# Altium PCB demo_dermis_main_testboard_scratch.PcbDoc (part 5 of 7)
Units mm, origin at the board's own origin, x right, y up, seen from the top; angles counter-clockwise.
Board outline 348.67 x 247.5 mm, 4 copper layers (Top Layer, Layer 1, Layer 2, Bottom Layer), stack 0.603 mm thick; 416 components, 288 nets, 1934 pads, 1690 vias.
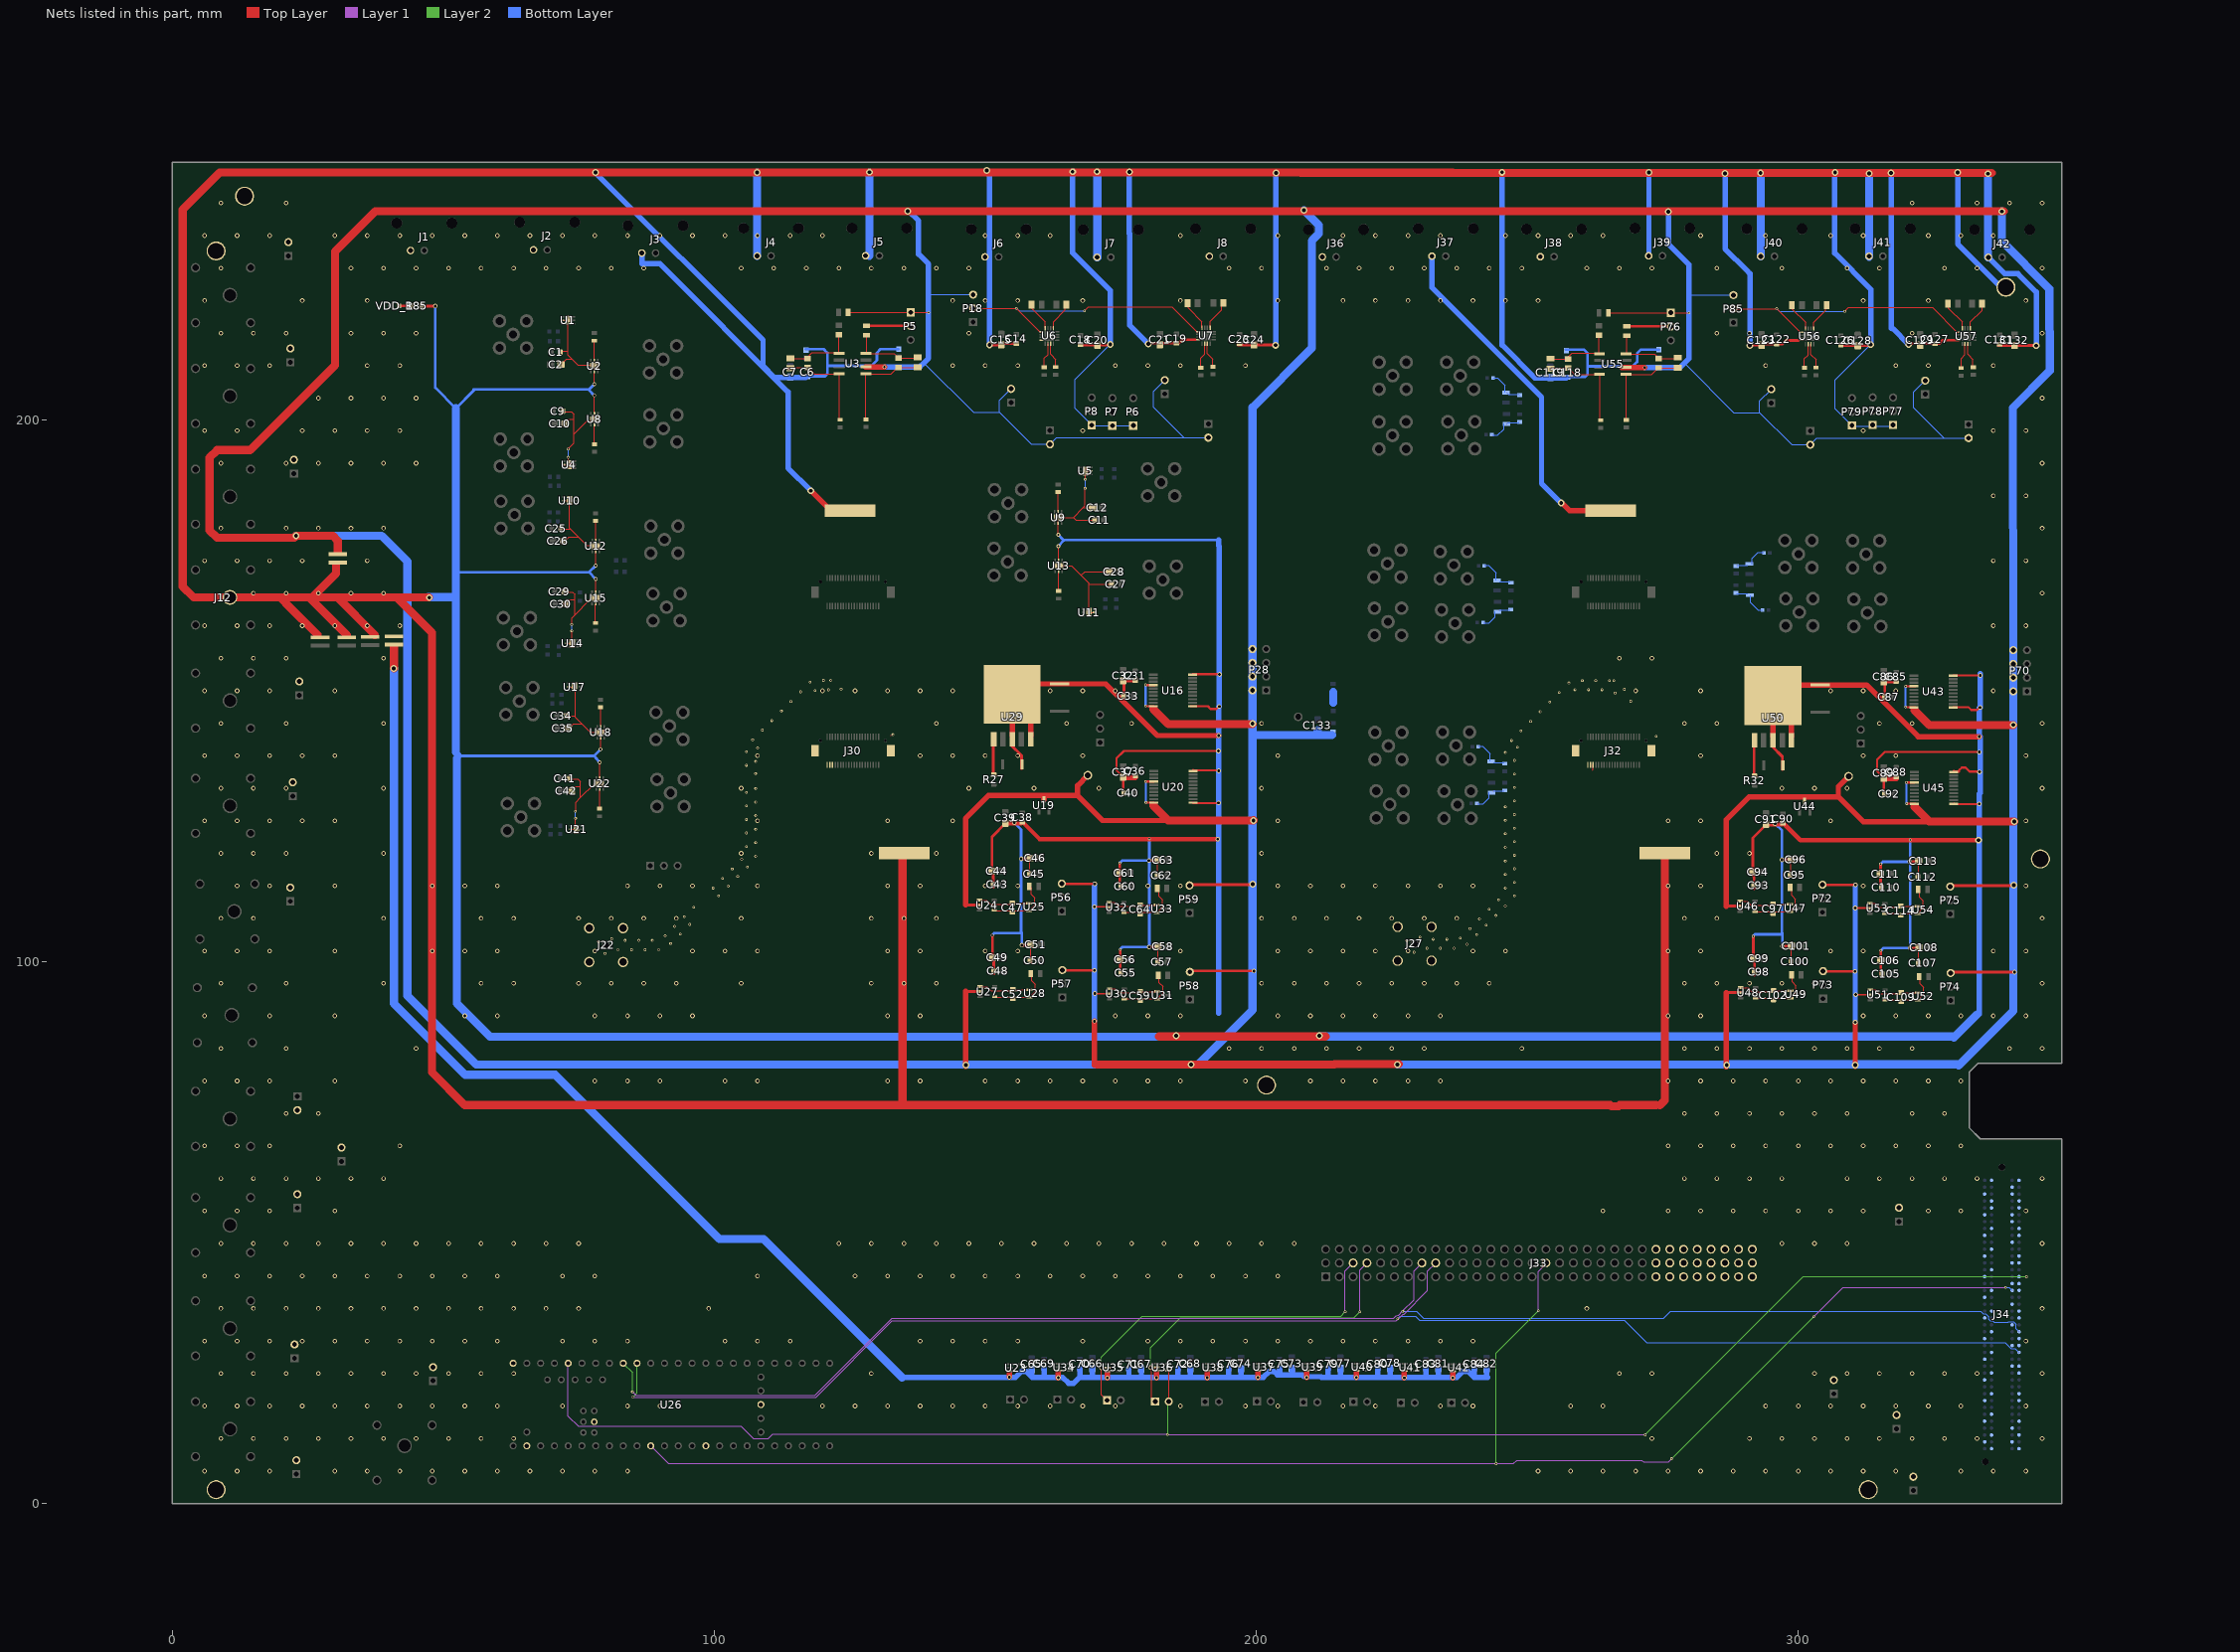
[diagram p6: the nets of this part, all layers, seen from the top]

## Via types
v1: diameter 0.85, hole 0.5, Top Layer to Bottom Layer, 1036 vias
v2: diameter 0.5, hole 0.3, Top Layer to Bottom Layer, 455 vias
v3: diameter 1.27, hole 0.711, Top Layer to Bottom Layer, 133 vias
v4: diameter 0.7, hole 0.4, Top Layer to Bottom Layer, 26 vias
v5: diameter 0.4, hole 0.25, Top Layer to Bottom Layer, 24 vias
v6: diameter 1.1, hole 0.7, Top Layer to Bottom Layer, 16 vias

## Nets (pads, with @x,y where several pads share a name; then routed paths per layer and width w, separated by ;. In a path a pad name is that pad's centre, name@x,y a point inside that pad or via, vN(x,y) a via of type N, cw(c..) or ccw(c..) an arc to the next point about the centre after c; other vN are vias at no path point) (continued)
GND: C1.2 C2.2 C3.2 C6.2 C7.2 C8.2 C9.2 C10.2 C11.2 C12.2 C14.2 C15.2 C18.2 C19.2 C20.2 C21.2 C23.2 C24.2 C25.2 C26.2 C27.2 C28.2 C29.2 C30.2 C31.2 C32.2 C33.2 C34.2 C35.2 C36.2 C37.2 C38.2 C39.2 C40.2 C41.2 C42.2 C43.2 C44.2 C45.2 C46.2 C48.2 C49.2 C50.2 C51.2 C53.2 C54.2 C55.2 C56.2 C57.2 C58.2 C60.2 C61.2 C62.2 C63.2 C85.2 C86.2 C87.2 C88.2 C89.2 C90.2 C91.2 C92.2 C93.2 C94.2 C95.2 C96.2 C98.2 C99.2 C100.2 C101.2 C103.2 C104.2 C105.2 C106.2 C107.2 C108.2 C110.2 C111.2 C112.2 C113.2 C115.2 C118.2 C119.2 C120.2 C122.2 C123.2 C126.2 C127.2 C128.2 C129.2 C131.2 C132.2 J1.1 J2.1 J3.1 J4.1 J5.1 J6.1 J7.1 J8.1 J12.1 J17.1 J19.1 J21.1 J22.2 J22.3 J22.4 J22.5 J24.1 J27.2 J27.3 J27.4 J27.5 J30.36 J30.38 J30.40 J30.S1 J30.S2 J32.36 J32.38 J32.40 J32.S1 J32.S2 J33.73 J33.74 J33.75 J33.76 J33.77 J33.78 J33.79 J33.80 J33.81 J33.82 J33.83 J33.84 J33.85 J33.86 J33.87 J33.88 J33.89 J33.90 J33.91 J33.92 J33.93 J33.94 J33.95 J33.96 J34.C01 J34.C04 J34.C05 J34.C08 J34.C09 J34.C12 J34.C13 J34.C16 J34.C17 J34.C20 J34.C21 J34.C24 J34.C25 J34.C28 J34.C29 J34.C32 J34.C33 J34.C36 J34.C38 J34.C40 J34.D02 J34.D03 J34.D06 J34.D07 J34.D10 J34.D13 J34.D16 J34.D19 J34.D22 J34.D25 J34.D28 J34.D37 J34.D39 J34.G01 J34.G04 J34.G05 J34.G08 J34.G11 J34.G14 J34.G17 J34.G20 J34.G23 J34.G26 J34.G29 J34.G32 J34.G35 J34.G38 J34.G40 J34.H03 J34.H06 J34.H09 J34.H12 J34.H15 J34.H18 J34.H21 J34.H24 J34.H27 J34.H30 J34.H33 J34.H36 J34.H39 J36.1 J37.1 J38.1 J39.1 J40.1 J41.1 J42.1 P3.2 P6.1 P7.1 P8.1 P11.2 P13.2 P23.2 P24.2 P26.2 P29.2 P34.2 P37.2 P42.2 P45.2 P48.2 P77.1 P78.1 P79.1 P80.2 P81.2 P82.2 P88.2 pad.3 R15.1 R16.1 R17.1 R18.1 R20.1 R85.2 U1.5 U1.7 U2.5 U2.7 U4.5 U4.7 U5.5 U5.7 U6.16 U7.16 U8.5 U8.7 U9.5 U9.7 U10.5 U10.7 U11.5 U11.7 U12.5 U12.7 U13.5 U13.7 U14.5 U14.7 U15.5 U15.7 U16.11 U16.20 U17.5 U17.7 U18.5 U18.7 U20.11 U20.20 U21.5 U21.7 U22.5 U22.7 U26.GND1 U26.GND2 U26.GND3 U26.GND4 U26.GND5 U29.3 U29.5 U29.6 U43.11 U43.20 U45.11 U45.20 U50.3 U50.5 U50.6 U56.16 U57.16 | length 3091.6
  Top Layer w0.15: U10.5@72.283,185.099 73.309,185.099 U10.7@73.312,185.099 ; 132.532,141.741 132.564,141.708 ; C46.2@157.999,118.994 158.253,118.994 C46.2@158.263,119.087 ; C51.2@158.1,103.043 158.354,103.043 C51.2@158.364,103.135 ; 166.266,181.98 166.792,181.454 C11.2@170.184,181.454 ; 167.719,171.268 168.438,171.987 C28.2@172.892,171.987 ; 168.035,183.749 C12.2@169.754,183.749 ; U5.7@168.477,190.55 U5.5@169.506,190.55 ; 169.158,169.703 169.17,169.692 C27.2@173.322,169.692 ; C63.2@181.565,118.659 181.819,118.659 C63.2@181.828,118.752 ; C58.2@181.63,102.709 181.884,102.709 C58.2@181.894,102.802 ; 262.09,135.361 262.169,135.44 J32.36@262.169,136.33 ; C96.2@298.36,118.793 298.614,118.793 C96.2@298.623,118.886 ; C101.2@298.461,102.842 298.715,102.842 C101.2@298.724,102.935 ; C113.2@321.925,118.458 322.179,118.458 C113.2@322.188,118.55 ; C108.2@321.991,102.508 322.245,102.508 C108.2@322.254,102.601 ; 328.858,214.704 328.861,214.701
  Top Layer w0.2: C1.2@71.358,212.66 73.023,212.66 ; C2.2@71.779,210.373 71.855,210.373 72.705,211.223 73.797,211.223 ; C25.2@71.82,179.808 73.48,179.808 ; C9.2@71.947,201.474 71.957,201.486 73.69,201.486 74.103,201.072 74.103,200.074 ; U1.5@72.034,218.377 U1.7@73.062,218.377 73.062,211.957 73.797,211.223 ; C10.2@72.111,199.224 72.186,199.224 73.036,200.074 74.103,200.074 ; C29.2@72.157,168.208 73.89,168.208 74.303,167.795 74.303,166.797 ; U4.5@72.22,191.718 U4.7@73.249,191.718 73.082,191.885 v2(73.082,193.079) ; C26.2@72.316,177.521 73.166,178.371 74.824,178.371 ; C30.2@72.385,165.946 73.236,166.797 74.303,166.797 ; C34.2@72.667,145.331 74.327,145.331 ; U14.5@72.791,158.73 U14.7@73.82,158.73 ; v2(73.06,194.625) 74.103,195.667 74.103,197.315 ; C35.2@73.088,143.044 73.163,143.044 74.013,143.894 75.544,143.894 ; C41.2@73.171,133.707 74.903,133.707 75.316,133.295 75.316,132.296 ; U17.5@73.21,150.72 U17.7@74.239,150.72 ; U10.7@73.309,185.099 73.309,179.98 73.48,179.808 ; C42.2@73.399,131.446 74.25,132.296 75.316,132.296 ; U21.5@73.536,124.443 U21.7@74.565,124.443 ; U14.7@73.731,159.505 v2(73.731,161.057) ; v2@73.754,162.291 73.754,163.438 77.64,167.324 U15.7@78.149,167.324 ; 74.303,164.037 74.303,166.797 ; U17.7@74.407,150.552 74.374,150.518 74.374,147.68 74.407,147.646 74.407,145.073 77.135,142.344 U18.7@78.516,142.344 ; U21.7@74.427,125.001 v2(74.427,126.473) ; v2@74.45,127.786 74.45,129.428 75.335,130.313 ; U12.7@77.49,176.778 76.51,176.778 73.48,179.808 ; U8.5@77.891,200.878 v4(77.891,204.498) ; v4(77.891,206.59) U2.5@77.891,208.934 77.891,209.4 77.61,209.682 77.172,210.12 74.9,210.12 73.797,211.223 ; U8.5@77.922,201.152 U8.7@77.922,200.124 77.501,199.703 76.491,199.703 74.103,197.315 ; U15.7@78.151,167.136 v4(78.151,170.65) ; v4(78.157,173.096) U12.7@78.157,176.706 ; U22.7@78.878,132.849 78.845,132.819 77.841,132.819 75.335,130.313 ; U22.7@78.893,133.239 v4(78.893,136.753) ; v4(79.052,139.199) U18.7@79.052,142.259 ; U29.6@157.664,147.017 U29.6@158.412,147.017 ; C46.2@157.999,118.994 158.265,118.728 C45.2@158.265,116.454 ; C51.2@158.1,103.043 158.366,102.777 C50.2@158.366,100.503 ; U9.5@163.469,180.966 U9.7@163.469,181.995 163.482,181.98 166.266,181.98 168.035,183.749 168.445,184.16 v2@168.445,187.551 ; v4@163.476,178.797 U9.5@163.476,180.958 ; v4@163.523,176.658 163.523,173.084 U13.7@163.57,173.037 ; U13.7@164.379,173.044 165.943,173.044 167.719,171.268 169.158,169.829 169.158,169.703 U11.7@169.158,164.474 ; C18.2@167.586,213.898 C18.2@167.721,213.762 ; v2(168.469,189.019) U5.7@168.469,190.57 ; U11.7@169.123,164.474 U11.7@169.158,164.474 ; U11.5@170.151,164.474 U11.7@169.158,164.474 ; C37.2@175.453,134.057 C37.2@175.453,134.132 ; C63.2@181.565,118.659 181.831,118.393 C62.2@181.831,116.119 ; C58.2@181.63,102.709 181.896,102.443 C57.2@181.896,100.169 ; U50.6@298.024,146.816 U50.6@298.773,146.816 ; C96.2@298.36,118.793 298.626,118.527 C95.2@298.626,116.253 ; C101.2@298.461,102.842 298.727,102.576 C100.2@298.727,100.302 ; C89.2@315.813,133.856 C89.2@315.813,133.931 ; C113.2@321.925,118.458 322.191,118.192 C112.2@322.191,115.918 ; C108.2@321.991,102.508 322.257,102.242 C107.2@322.257,99.968 ; 74.103,197.315 74.103,200.074 ; 75.316,132.296 75.316,130.33 75.335,130.313
  Top Layer w0.4: C37.2@175.453,134.132 174.209,135.376 174.209,137.507 175.594,138.892 v1(193.044,138.892) ; U16.11@187.94,147.136 U16.11@188.253,147.136 191.092,147.136 191.579,146.649 192.625,146.649 193.107,147.131 v1@193.2,147.131 ; U16.20@188.253,152.986 188.253,153.015 188.298,153.061 v1@193.241,153.061 ; U20.11@188.359,129.351 188.359,129.272 v1@192.991,129.272 ; U20.20@188.359,135.375 188.446,135.288 193.129,135.288 v1@193.139,135.279 ; C89.2@315.813,133.931 314.57,135.175 314.57,137.305 315.955,138.691 v1(333.405,138.691) ; U43.11@328.614,146.935 331.452,146.935 331.939,146.448 332.986,146.448 v1@333.468,146.93 ; U43.20@328.614,152.785 328.614,152.814 328.659,152.86 v1@333.602,152.86 ; U45.11@328.719,129.15 328.719,129.071 v1@333.352,129.071 ; U45.20@328.719,135.174 328.806,135.087 329.705,135.087 329.705,135.348 330.188,135.831 330.872,135.831 331.616,135.087 v1@333.489,135.087 ; 328.861,214.701 U57.16@329.577,214.701
  Top Layer w0.5: R85.2@46.195,220.992 v1(48.535,220.992) ; v3(150.801,213.819) 150.822,213.841 152.973,213.841 C15.2@152.994,213.861 153.206,214.073 C14.2@155.754,214.073 ; C44.2@151.254,116.724 151.254,123.035 153.718,125.499 C39.2@153.718,125.573 ; C44.2@151.268,116.581 151.268,116.112 151.495,115.885 151.495,113.699 ; C49.2@151.355,100.773 v2@151.355,104.837 ; C49.2@151.369,100.63 151.369,100.161 151.596,99.934 151.596,97.748 ; U29.3@154.829,141.851 154.829,139.933 156.731,138.031 C53.2@156.731,135.635 ; v1(156.643,118.994) C46.2@157.999,118.994 ; v1(156.744,103.043) C51.2@158.1,103.043 ; v4@163.476,178.797 v4(163.485,178.789) ; v4(163.485,176.697) v4@163.523,176.658 ; C18.2@167.721,213.762 C20.2@170.712,213.762 v3@172.969,213.762 ; C60.2@174.834,113.795 v2(174.834,118.222) ; C55.2@174.899,97.846 v2(174.899,102.272) ; C40.2@175.453,130.869 C37.2@175.453,133.755 ; C33.2@175.533,149.052 175.603,149.052 C32.2@175.603,151.556 ; C32.2@175.603,151.775 C31.2@177.866,151.775 ; v3(180.107,214.002) 180.237,214.133 185.703,214.133 186.354,214.783 188.746,214.783 ; v1(180.208,118.659) C63.2@181.565,118.659 ; v1(180.274,102.709) C58.2@181.63,102.709 ; C23.2@196.617,213.822 v3@203.653,213.822 ; v3@291.095,213.762 293.245,213.762 C123.2@293.267,213.783 ; C94.2@291.615,116.523 291.615,122.834 294.078,125.297 C91.2@294.078,125.373 ; C94.2@291.629,116.38 291.629,115.911 291.856,115.684 291.856,113.498 ; C99.2@291.715,100.572 v2@291.715,104.636 ; C99.2@291.73,100.429 291.73,99.96 291.957,99.733 291.957,97.547 ; C123.2@293.479,213.994 C122.2@296.026,213.994 297.08,213.994 297.731,214.645 300.044,214.645 ; U50.3@295.189,141.65 295.189,139.732 297.092,137.83 C103.2@297.092,135.434 ; v1(297.003,118.793) C96.2@298.36,118.793 ; v1(297.104,102.842) C101.2@298.461,102.842 ; C126.2@307.993,213.683 C128.2@310.984,213.683 v3@313.241,213.683 ; C110.2@315.194,113.594 v2(315.194,118.021) ; C105.2@315.26,97.645 v2(315.26,102.071) ; C92.2@315.813,130.669 C89.2@315.813,133.555 ; C87.2@315.894,148.852 315.963,148.852 C86.2@315.963,151.355 ; C86.2@315.963,151.574 C85.2@318.227,151.574 ; v3@320.509,214.054 325.976,214.054 326.626,214.704 328.858,214.704 ; v1(320.569,118.458) C113.2@321.925,118.458 ; v1(320.634,102.508) C108.2@321.991,102.508 ; C131.2@336.889,213.743 v3@343.925,213.743
  Top Layer w0.8: C39.2@153.718,125.573 C38.2@156.652,125.573 ; C38.2@156.841,125.763 156.891,125.763 160.019,122.634 182.945,122.634 182.917,122.631 v1(192.882,122.631) ; C91.2@294.078,125.373 C90.2@297.012,125.373 ; C90.2@297.201,125.561 297.251,125.561 300.38,122.433 323.306,122.433 323.278,122.43 v3(333.243,122.43)
  Top Layer w1: v3(117.844,186.91) 121.502,183.253 J17.1@125.062,183.253 ; U29.3@154.985,141.728 U29.6@154.985,149.335 ; U29.6@156.392,147.927 U29.6@154.985,149.335 ; U29.5@158.412,141.711 U29.6@158.412,147.017 ; 172.08,151.275 156.919,151.275 U29.6@154.982,149.338 U29.6@154.985,149.335 ; 172.255,151.275 175.005,148.525 181.793,141.737 v1(193.064,141.737) ; C37.2@175.453,133.974 C36.2@177.716,133.974 ; v3(256.268,184.654) 256.428,184.654 257.83,183.253 J21.1@265.386,183.253 ; U50.3@295.346,141.527 295.346,149.134 U50.6@295.343,149.137 297.28,151.074 312.441,151.074 ; U50.5@298.773,141.511 U50.6@298.773,146.816 ; 312.616,151.074 322.153,141.536 v1(333.424,141.536) ; C89.2@315.813,133.774 C88.2@318.077,133.774
  Top Layer w1.5: 26.805,160.339 26.197,160.947 21.822,165.322 19.924,167.22 ; 30.265,173.167 30.265,171.63 25.855,167.22 ; 32.222,160.287 25.289,167.22 ; 37.411,160.306 30.497,167.22 ; v3@47.404,167.22 41.422,167.22 ; J19.1@134.735,119.782 134.735,73.534 ; 182.085,86.184 212.804,86.184 ; v3@203.69,245.621 208.251,245.616 211.751,245.613 215.251,245.609 218.751,245.605 222.251,245.602 225.751,245.598 229.251,245.595 232.751,245.591 236.251,245.587 v3@245.169,245.578 ; v3@203.69,245.641 8.803,245.641 1.933,238.771 1.933,169.255 3.968,167.22 J12.1@10.67,167.22 19.924,167.22 ; v3@245.359,245.578 249.411,245.574 261.196,245.562 335.688,245.562 ; 273.759,73.534 273.756,73.532 267.045,73.532 266.845,73.332 265.531,73.332 265.331,73.532 134.737,73.532 134.735,73.534 ; 274.507,73.534 275.386,74.413 J24.1@275.386,120.052 ; 19.924,167.22 25.289,167.22 ; 25.289,167.22 25.855,167.22 ; 25.855,167.22 30.497,167.22 ; 30.497,167.22 41.422,167.22 ; 41.422,167.22 47.941,160.701 47.941,79.602 54.009,73.534 134.735,73.534
  Bottom Layer w0.15: v3@47.286,167.274 47.44,167.12 v3(47.44,167.184)
  Bottom Layer w0.2: v2(73.06,194.625) 73.082,194.603 v2(73.082,193.079) ; v2@73.719,161.067 v2@73.719,162.234 ; v2@74.415,126.563 v2@74.415,127.729 ; v2@168.48,187.551 v2@168.48,189.008 ; P8.1@169.139,198.922 P7.1@173.467,198.922 P6.1@177.796,198.922 ; P8.1@169.657,199.017 166.579,202.095 166.579,207.441 v3(173.081,213.943) ; P79.1@309.412,198.843 P77.1@318.068,198.843 ; P79.1@309.929,198.938 306.852,202.016 306.852,207.362 v3(313.354,213.863)
  Bottom Layer w0.5: v1(48.535,220.992) 48.55,205.897 52.326,202.122 55.63,205.426 55.63,205.612 76.912,205.612 v4(77.891,206.59) ; 52.43,171.87 76.931,171.87 v4(78.151,170.65) ; 52.953,137.973 77.826,137.973 v4(78.893,136.753) ; 76.912,205.477 v4(77.891,204.498) ; 76.96,171.899 v4(78.157,173.096) ; 77.855,138.002 v4(79.052,139.199) ; C3.2@116.864,213.049 120.199,213.049 120.877,212.371 120.877,209.974 ; C6.2@117.207,207.934 117.137,208.037 120.442,208.037 120.877,208.471 120.877,209.974 ; C8.2@134.037,213.047 130.702,213.047 130.024,212.369 130.024,210.977 129.789,210.742 129.02,209.974 120.877,209.974 ; v2(151.292,104.871) 151.677,105.256 156.744,105.256 v1(156.744,103.043) ; v1(155.383,125.659) 156.643,124.399 v1(156.643,118.994) 156.643,105.483 156.72,105.406 ; v4(163.485,176.697) 164.531,177.743 164.463,177.81 v4(163.485,178.789) ; 164.698,177.81 193.05,177.81 ; v2(174.834,118.222) 175.271,118.659 v1(180.208,118.659) ; v2(174.899,102.272) 175.337,102.709 v1(180.274,102.709) ; v1@180.278,102.709 180.278,112 180.278,118.481 180.278,118.659 v2(180.278,122.672) ; C115.2@257.136,212.97 260.471,212.97 261.149,212.292 261.149,209.895 ; C118.2@257.48,207.855 257.409,207.958 260.715,207.958 261.149,208.392 261.149,209.895 ; C120.2@274.309,212.968 270.974,212.968 270.296,212.29 270.296,210.707 269.484,209.895 261.149,209.895 ; v2(291.653,104.669) 292.038,105.055 297.104,105.055 v1(297.104,102.842) ; v1(295.743,125.459) 297.003,124.198 v1(297.003,118.793) 297.003,105.282 297.08,105.205 ; v2(315.194,118.021) 315.632,118.458 v1(320.569,118.458) ; v2(315.26,102.071) 315.697,102.508 v1(320.634,102.508) ; v1@320.638,102.508 320.638,112 v1@320.638,118.28 ; v1@320.638,118.458 v2(320.638,122.471)
  Bottom Layer w1: 51.879,167.459 52.326,167.459 ; 52.326,138.65 52.953,138.022 52.953,137.973 52.503,137.523 ; v3(78.117,245.632) 78.699,245.049 109.019,214.729 109.019,209.943 111.164,207.799 C6.2@116.899,207.799 ; J3.1@86.658,230.777 86.658,228.828 89.959,228.828 113.633,205.154 113.633,191.122 v3(117.844,186.91) ; v3(150.801,213.819) 150.837,213.856 150.837,245.604 ; v3(166.124,245.785) 166.124,230.814 173.092,223.845 v3(173.081,213.943) ; v3@176.611,245.709 176.611,234.398 176.644,234.365 176.644,217.464 v3(180.107,214.002) ; 193.05,90.487 v1(193.05,129.301) 193.05,147.048 v1@193.06,147.058 ; v1@193.05,153.025 v1@193.06,153.015 ; 193.05,177.81 193.05,176.81 193.2,176.66 v1(193.2,147.102) ; v3@203.653,213.805 v3@203.653,245.553 ; J37.1@232.426,230.206 232.426,224.416 252.649,204.193 252.649,188.273 v3(256.268,184.654) ; v3(245.359,245.683) 245.359,213.797 251.437,207.72 C118.2@257.172,207.72 ; J39.1@272.408,230.256 272.462,230.256 v3(272.462,245.661) ; v3(286.517,245.467) 286.517,231.551 290.534,227.534 291.11,226.958 v3@291.11,213.777 ; v3@306.725,245.095 306.725,230.747 313.39,224.081 v3@313.39,213.9 ; 317.145,216.89 v3(317.145,245.551) ; 317.466,216.836 v3(320.379,213.923) ; v3(329.44,245.626) 329.44,232.45 pad.3@337.871,224.018 ; 333.411,90.286 333.411,130.969 333.593,131.151 333.593,141.536 333.42,141.708 v1@333.42,146.857 ; v1(333.561,146.901) v1@333.561,153.17 ; J42.1@335.084,229.988 338.099,226.973 340.538,226.973 343.925,223.586 v3@343.925,213.726
  Bottom Layer w1.5: v3@47.286,167.274 51.694,167.274 ; 52.326,138.65 52.326,167.274 ; 52.326,167.459 52.326,202.122 ; 52.503,137.523 52.503,92.314 58.636,86.181 v3@185.219,86.181 ; J4.1@107.952,230.246 v3@107.952,245.627 ; 128.663,230.287 v3@128.663,245.668 ; J7.1@170.645,230.003 170.695,229.971 v3@170.695,245.353 ; v3@211.621,86.211 328.554,86.211 ; J40.1@293.076,230.167 v3@293.076,245.549 ; J41.1@313.067,230.193 313.1,230.11 v3(313.1,245.492) ; 328.723,85.98 329.622,86.878 333.03,90.286 ; v3@335.005,245.385 335.005,230.003 J42.1@335.084,229.988
  other v1: 6,6 12,6 18,6 30,6 36,6 42,6 48,6 54,6 60,6 66,6 72,6 78,6 84,6 252,6 258,6 264,6 270,6 276,6 282,6 288,6 294,6 300,6 306,6 312,6 318,6 330,6 336,6 342,6 9,12 15,12 21,12 27,12 33,12 39,12 45,12 51,12 57,12 63,12 273,12 291,12 297,12 303,12 309,12 315,12 321,12 327,12 333,12 345,12 6,18 12,18 18,18 24,18 30,18 36,18 42,18 48,18 54,18 60,18 72,18 84,18 90,18 120,18 126,18 132,18 138,18 144,18 150,18 156,18 162,18 168,18 174,18 186,18 198,18 204,18 216,18 222,18 234,18 240,18 258,18 264,18 294,18 300,18 306,18 312,18 318,18 324,18 330,18 342,18 9,24 15,24 21,24 27,24 33,24 39,24 45,24 51,24 57,24 63,24 129,24 267,24 273,24 303,24 309,24 315,24 321,24 327,24 333,24 345,24 6,30 12,30 18,30 24,30 30,30 36,30 42,30 48,30 54,30 60,30 72,30 78,30 84,30 102,30 108,30 114,30 138,30 144,30 150,30 156,30 168,30 180,30 186,30 192,30 198,30 204,30 210,30 216,30 222,30 228,30 234,30 240,30 342,30 9,36 15,36 21,36 27,36 33,36 39,36 45,36 51,36 57,36 63,36 69,36 75,36 99,36 261,36 345,36 6,42 12,42 18,42 24,42 30,42 36,42 42,42 48,42 54,42 60,42 72,42 78,42 108,42 126,42 132,42 138,42 144,42 150,42 156,42 162,42 168,42 174,42 180,42 186,42 192,42 198,42 204,42 9,48 15,48 21,48 27,48 33,48 39,48 45,48 51,48 57,48 63,48 69,48 75,48 123,48 129,48 135,48 141,48 147,48 153,48 159,48 165,48 171,48 177,48 183,48 189,48 195,48 201,48 207,48 297,48 303,48 309,48 345,48 6,54 12,54 18,54 30,54 264,54 276,54 282,54 288,54 294,54 300,54 306,54 312,54 324,54 330,54 342,54 9,60 15,60 21,60 27,60 33,60 39,60 279,60 285,60 291,60 297,60 309,60 315,60 321,60 327,60 333,60 345,60 6,66 12,66 18,66 42,66 276,66 282,66 288,66 294,66 300,66 306,66 312,66 318,66 324,66 330,66 21,72 27,72 279,72 285,72 291,72 297,72 303,72 309,72 321,72 327,72 6,78 12,78 18,78 30,78 78,78 84,78 90,78 102,78 108,78 132,78 138,78 150,78 156,78 162,78 168,78 174,78 180,78 186,78 198,78 210,78 216,78 222,78 228,78 234,78 276,78 282,78 288,78 294,78 300,78 306,78 312,78 318,78 324,78 330,78 9,84 21,84 45,84 195,84 201,84 207,84 213,84 219,84 225,84 231,84 249,84 279,84 285,84 291,84 297,84 303,84 309,84 315,84 321,84 339,84 345,84 6,90 18,90 30,90 54,90 60,90 78,90 84,90 90,90 96,90 132,90 138,90 174,90 180,90 186,90 204,90 210,90 216,90 222,90 228,90 234,90 276,90 282,90 312,90 318,90 324,90 330,90 336,90 342,90 9,96 21,96 39,96 57,96 63,96 75,96 81,96 87,96 93,96 105,96 129,96 135,96 141,96 201,96 207,96 213,96 219,96 225,96 231,96 237,96 243,96 279,96 285,96 291,96 297,96 303,96 345,96 6,102 12,102 18,102 30,102 48,102 54,102 60,102 78,102 96,102 102,102 108,102 132,102 138,102 150,102 156,102 186,102 204,102 210,102 216,102 222,102 228,102 240,102 246,102 276,102 282,102 306,102 312,102 336,102 342,102 9,108 15,108 39,108 57,108 63,108 75,108 81,108 87,108 93,108 105,108 129,108 135,108 141,108 201,108 207,108 213,108 219,108 225,108 231,108 237,108 279,108 285,108 345,108 12,114 18,114 30,114 48,114 54,114 60,114 84,114 90,114 96,114 108,114 132,114 138,114 150,114 156,114 180,114 186,114 204,114 210,114 216,114 222,114 228,114 234,114 240,114 276,114 282,114 312,114 342,114 9,120 15,120 21,120 39,120 105,120 129,120 141,120 201,120 285,120 291,120 6,126 12,126 18,126 24,126 30,126 108,126 132,126 144,126 204,126 276,126 282,126 306,126 342,126 333.411,129.1 9,132 15,132 21,132 39,132 105,132 147,132 159,132 171,132 201,132 297,132 303,132 309,132 345,132 333.446,135.024 193.085,135.225 6,138 12,138 18,138 24,138 30,138 108,138 138,138 144,138 150,138 156,138 168,138 204,138 282,138 312,138 318,138 342,138 9,144 21,144 39,144 141,144 165,144 177,144 201,144 279,144 285,144 315,144 321,144 345,144 6,150 12,150 18,150 30,150 120,150 126,150 132,150 138,150 144,150 162,150 168,150 174,150 186,150 270,150 282,150 306,150 312,150 318,150 336,150 333.596,152.824 193.235,153.025 9,156 15,156 21,156 39,156 267,156 273,156 6,162 12,162 18,162 24,162 30,162 36,162 42,162 336,162 342,162 15,168 21,168 27,168 33,168 39,168 345,168 6,174 12,174 18,174 24,174 36,174 336,174 342,174 9,180 21,180 27,180 33,180 39,180 345,180 336,186 342,186 9,192 21,192 27,192 33,192 39,192 45,192 345,192 6,198 12,198 24,198 30,198 36,198 42,198 168,198 312,198 336,198 342,198 27,204 33,204 39,204 45,204 345,204 6,210 12,210 18,210 36,210 42,210 144,210 150,210 156,210 174,210 180,210 186,210 198,210 294,210 318,210 324,210 336,210 9,216 15,216 21,216 33,216 39,216 45,216 147,216 285,216 291,216 321,216 345,216 6,222 24,222 36,222 144,222 150,222 156,222 168,222 186,222 204,222 216,222 222,222 228,222 234,222 240,222 246,222 252,222 312,222 324,222 342,222 9,228 33,228 39,228 45,228 51,228 57,228 63,228 69,228 75,228 81,228 87,228 105,228 111,228 117,228 123,228 129,228 135,228 141,228 147,228 195,228 201,228 213,228 219,228 225,228 231,228 237,228 243,228 249,228 261,228 267,228 273,228 285,228 297,228 309,228 315,228 327,228 333,228 345,228 6,234 12,234 18,234 30,234 36,234 42,234 48,234 54,234 60,234 66,234 72,234 78,234 84,234 90,234 96,234 102,234 108,234 114,234 120,234 150,234 156,234 162,234 186,234 204,234 216,234 222,234 228,234 234,234 246,234 252,234 258,234 264,234 282,234 294,234 306,234 312,234 324,234 330,234 336,234 9,240 21,240 321,240 333,240 339,240 345,240
  other v2: 79.846,101.528 229.109,101.755 82.253,102.203 84.753,102.203 87.253,102.203 89.753,102.203 231.505,102.47 234.005,102.47 236.505,102.47 238.892,103.212 91.98,103.34 78.658,103.727 227.789,103.878 83.588,103.933 86.088,103.933 88.588,103.933 232.674,104.145 235.174,104.145 81.106,104.233 237.665,104.353 230.203,104.529 90.949,104.755 240.66,104.979 93.747,105.108 239.433,106.121 92.716,106.523 242.428,106.747 95.515,106.876 241.2,107.889 94.484,108.291 244.196,108.515 242.968,109.657 96.252,110.058 245.963,110.283 244.736,111.424 247.627,112.149 100.818,112.179 99.788,113.594 245.973,113.597 102.586,113.947 247.649,114.649 101.555,115.362 104.354,115.714 245.973,116.097 103.323,117.129 247.649,117.149 106.122,117.482 245.973,118.597 105.091,118.897 107.663,119.45 247.649,119.649 245.973,121.097 105.934,121.251 107.663,121.95 247.649,122.149 245.973,123.597 105.934,123.751 107.663,124.45 247.649,124.649 245.973,126.097 105.934,126.251 107.663,126.95 247.649,127.149 74.405,127.741 245.973,128.597 105.934,128.751 107.663,129.45 247.649,129.649 105.934,131.251 107.663,131.95 247.649,132.149 247.649,134.649 107.631,134.736 105.934,136.251 107.663,136.95 247.649,137.149 245.973,138.597 105.934,138.751 108.005,139.427 248.205,139.586 247.086,140.836 107.097,140.964 273.766,141.579 132.98,141.903 248.853,142.603 108.864,142.732 250.621,144.371 110.632,144.499 252.389,146.139 112.4,146.267 254.157,147.907 114.168,148.035 269.115,148.055 266.234,149.57 255.924,149.675 115.935,149.803 118.612,150.034 121.108,150.181 258.813,150.192 261.313,150.192 263.813,150.192 267.922,150.252 123.428,150.306 257.692,151.442 117.703,151.571 260.156,151.867 262.656,151.867 265.156,151.867 266.009,151.861 120.179,151.916 121.509,151.909 73.709,162.245 168.441,187.379
  other v3: 185.219,86.306 211.621,86.306 343.889,213.689 291.073,213.74 203.617,213.768 334.976,245.413 293.047,245.577 203.69,245.59 107.923,245.656 306.809,245.642 128.634,245.697 176.617,245.709 170.619,245.781 150.288,245.988
LDACb: J33.50 J34.D17 U26.16 | length 307.3
  Layer 1 w0.15: U26.16@88.305,10.65 91.573,7.382 v2(244.267,7.382) 247.462,7.382 248.092,8.012 271.117,8.012 271.456,7.672 276.04,7.672 v2(276.641,8.273) ; v2(252.051,35.578) 252.051,42.778 253.444,44.17 J33.50@253.444,44.403 ; v2(302.845,34.477) 308.255,39.887 v2(338.26,39.887)
  Layer 2 w0.15: v2(244.267,7.382) 244.267,27.793 v2(252.051,35.578) ; v2(276.641,8.273) v2(302.845,34.477)
  Bottom Layer w0.15: v2(338.26,39.887) 338.924,39.887 J34.D17@339.476,39.336
NetC4_1: C4.1 R4.2 R7.1 U3.8 | length 12.5
  Top Layer w0.2: U3.8@128.072,212.216 U3.8@127.996,212.291 128.113,212.407 R4.2@128.113,215.607 ; U3.8@128.344,212.216 133.209,212.216 R7.1@133.612,211.813 ; R7.1@133.974,211.387 137.372,211.387 C4.1@137.543,211.558
NetC4_2: C4.2 R1.1 R7.2 U3.5 | length 18.2
  Top Layer w0.2: U3.5@127.996,208.481 127.996,200.084 R1.1@128.014,200.067 ; U3.5@128.25,208.481 132.677,208.481 133.877,209.681 R7.2@133.974,209.681 137.521,209.681 C4.2@137.543,209.704
NetC5_1: C5.1 R5.1 R6.1 U3.1 | length 13.1
  Top Layer w0.2: C5.1@114.064,211.373 114.12,211.316 R6.1@117.254,211.316 117.352,211.316 117.303,211.365 117.188,211.48 117.188,211.54 118.031,212.383 122.88,212.383 122.977,212.383 122.973,212.387 R5.1@122.973,215.706
NetC5_2: C5.2 R2.1 R6.2 U3.4 | length 17.7
  Top Layer w0.2: C5.2@114.064,209.518 114.156,209.611 R6.2@117.254,209.611 117.352,209.611 118.481,208.481 U3.4@122.773,208.481 ; U3.4@123.069,208.481 123.121,208.429 R2.1@123.121,199.983
NetC13_2: C13.2 U6.12 | length 5.4
  Top Layer w0.2: C13.2@158.564,221.265 158.564,220.582 161.083,218.063 U6.12@161.083,216.922
NetC16_1: C16.1 U6.9 | length 5.3
  Top Layer w0.2: U6.9@162.584,216.922 162.584,217.202 162.611,217.229 162.611,218.087 164.77,220.246 164.77,221.049 C16.1@164.961,221.241
NetC17_2: C17.2 U7.12 | length 5.4
  Top Layer w0.2: C17.2@187.46,221.324 187.46,220.641 189.979,218.122 U7.12@189.979,216.981
NetC22_1: C22.1 U7.9 | length 5.3
  Top Layer w0.2: U7.9@191.479,216.981 191.479,217.261 191.506,217.288 191.506,218.146 193.665,220.305 193.665,221.108 C22.1@193.857,221.299
NetC47_1: C47.1 R25.2 U24.4 U25.2 | length 12.1
  Top Layer w0.2: U24.4@151.667,109.48 U24.4@151.704,109.443 ; U24.4@151.726,109.421 U24.4@151.704,109.443 ; R25.2@158.144,113.923 158.476,113.591 158.476,112.408 159.139,111.745 159.139,110.503 158.57,109.934 158.57,109.534 158.441,109.406 U25.2@158.099,109.406 158.061,109.443 U24.4@151.704,109.443
NetC47_2: C47.2 U24.1 U25.1 | length 9.8
  Top Layer w0.2: U24.1@149.204,111.308 150.251,111.308 150.973,110.587 154.767,110.587 C47.2@155.004,110.825 ; C47.2@155.138,110.954 C47.2@155.338,110.754 ; C47.2@155.139,110.954 155.339,110.754 U25.1@158.327,110.754
NetC52_1: C52.1 R26.2 U27.4 U28.2 | length 12.1
  Top Layer w0.2: U27.4@151.768,93.528 U27.4@151.805,93.491 ; U27.4@151.827,93.47 U27.4@151.805,93.491 ; R26.2@158.245,97.972 158.577,97.64 158.577,96.457 159.24,95.793 159.24,94.552 158.671,93.983 158.671,93.583 158.542,93.454 U28.2@158.2,93.454 158.162,93.491 U27.4@151.805,93.491
NetC52_2: C52.2 U27.1 U28.1 | length 9.8
  Top Layer w0.2: U27.1@149.305,95.357 150.352,95.357 151.074,94.636 154.868,94.636 C52.2@155.105,94.873 ; C52.2@155.239,95.003 C52.2@155.439,94.803 ; C52.2@155.24,95.003 155.44,94.803 U28.1@158.428,94.803
NetC59_1: C59.1 R28.2 U30.4 U31.2 | length 12.1
  Top Layer w0.2: U30.4@175.298,93.195 U30.4@175.335,93.158 ; U30.4@175.357,93.136 U30.4@175.335,93.158 ; R28.2@181.775,97.638 182.107,97.306 182.107,96.123 182.77,95.46 182.77,94.218 182.201,93.649 182.201,93.249 182.072,93.121 U31.2@181.73,93.121 181.692,93.158 U30.4@175.335,93.158
NetC59_2: C59.2 U30.1 U31.1 | length 9.8
  Top Layer w0.2: U30.1@172.835,95.023 173.882,95.023 174.604,94.302 178.398,94.302 C59.2@178.635,94.54 ; C59.2@178.769,94.669 C59.2@178.969,94.469 ; C59.2@178.77,94.669 178.97,94.469 U31.1@181.958,94.469
NetC64_1: C64.1 R29.2 U32.4 U33.2 | length 12.1
  Top Layer w0.2: U32.4@175.232,109.145 U32.4@175.269,109.107 ; U32.4@175.291,109.085 U32.4@175.269,109.107 ; R29.2@181.709,113.587 182.041,113.256 182.041,112.073 182.704,111.409 182.704,110.168 182.136,109.599 182.136,109.199 182.007,109.07 U33.2@181.664,109.07 181.627,109.107 U32.4@175.269,109.107
NetC64_2: C64.2 U32.1 U33.1 | length 9.8
  Top Layer w0.2: U32.1@172.769,110.973 173.817,110.973 174.538,110.251 178.332,110.251 C64.2@178.57,110.489 ; C64.2@178.704,110.619 C64.2@178.904,110.419 ; C64.2@178.705,110.619 178.905,110.419 U33.1@181.893,110.419
NetC97_1: C97.1 R30.2 U46.4 U47.2 | length 12.1
  Top Layer w0.2: U46.4@292.027,109.279 U46.4@292.065,109.242 ; U46.4@292.086,109.22 U46.4@292.065,109.242 ; R30.2@298.504,113.722 298.517,113.709 298.836,113.39 298.836,112.207 299.5,111.544 299.5,110.302 298.931,109.733 298.931,109.333 298.802,109.205 U47.2@298.459,109.205 298.422,109.242 U46.4@292.065,109.242
NetC97_2: C97.2 U46.1 U47.1 | length 9.8
  Top Layer w0.2: U46.1@289.564,111.107 290.612,111.107 291.333,110.386 295.127,110.386 C97.2@295.365,110.624 ; C97.2@295.499,110.753 C97.2@295.699,110.553 ; C97.2@295.5,110.753 295.7,110.553 U47.1@298.688,110.553
NetC102_1: C102.1 R31.2 U48.4 U49.2 | length 12.1
  Top Layer w0.2: U48.4@292.128,93.328 U48.4@292.166,93.29 ; U48.4@292.187,93.268 U48.4@292.166,93.29 ; R31.2@298.605,97.77 298.779,97.597 298.937,97.439 298.937,96.256 299.601,95.592 299.601,94.351 299.032,93.782 299.032,93.382 298.903,93.253 U49.2@298.56,93.253 298.523,93.29 U48.4@292.166,93.29
NetC102_2: C102.2 U48.1 U49.1 | length 9.8
  Top Layer w0.2: U48.1@289.665,95.156 290.713,95.156 291.434,94.435 295.228,94.435 C102.2@295.465,94.672 ; C102.2@295.6,94.802 C102.2@295.8,94.602 ; C102.2@295.601,94.802 295.801,94.602 U49.1@298.789,94.602
NetC109_1: C109.1 R33.2 U51.4 U52.2 | length 12.1
  Top Layer w0.2: U51.4@315.658,92.994 U51.4@315.696,92.957 ; U51.4@315.717,92.935 U51.4@315.696,92.957 ; R33.2@322.135,97.437 322.309,97.263 322.467,97.105 322.467,95.922 323.131,95.259 323.131,94.017 322.562,93.448 322.562,93.048 322.433,92.92 U52.2@322.09,92.92 322.053,92.957 U51.4@315.696,92.957
NetC109_2: C109.2 U51.1 U52.1 | length 9.8
  Top Layer w0.2: U51.1@313.195,94.822 314.243,94.822 314.964,94.101 318.758,94.101 C109.2@318.996,94.338 ; C109.2@319.13,94.468 C109.2@319.33,94.268 ; C109.2@319.131,94.468 319.331,94.268 U52.1@322.319,94.268
NetC114_1: C114.1 R34.2 U53.4 U54.2 | length 12.1
  Top Layer w0.2: U53.4@315.593,108.943 U53.4@315.63,108.906 ; U53.4@315.652,108.885 U53.4@315.63,108.906 ; R34.2@322.07,113.387 322.119,113.337 322.401,113.055 322.401,111.872 323.065,111.208 323.065,109.967 322.496,109.398 322.496,108.998 322.367,108.869 U54.2@322.025,108.869 321.987,108.906 U53.4@315.63,108.906
NetC114_2: C114.2 U53.1 U54.1 | length 9.8
  Top Layer w0.2: U53.1@313.13,110.772 314.177,110.772 314.899,110.05 318.692,110.05 C114.2@318.93,110.288 ; C114.2@319.064,110.418 C114.2@319.264,110.218 ; C114.2@319.065,110.418 319.265,110.218 U54.1@322.253,110.218
NetC116_1: C116.1 R37.2 R40.1 U55.8 | length 12.5
  Top Layer w0.2: U55.8@268.344,212.137 U55.8@268.269,212.212 268.385,212.328 R37.2@268.385,215.528 ; U55.8@268.616,212.137 273.482,212.137 R40.1@273.884,211.734 ; R40.1@274.247,211.308 277.645,211.308 C116.1@277.816,211.479
NetC116_2: C116.2 R35.1 R40.2 U55.5 | length 18.4
  Top Layer w0.2: U55.5@268.269,208.402 268.269,200.005 R35.1@268.286,199.988 ; U55.5@268.296,208.402 272.95,208.402 274.15,209.602 R40.2@274.247,209.602 277.793,209.602 C116.2@277.816,209.625
NetC117_1: C117.1 R38.1 R39.1 U55.1 | length 12.6
  Top Layer w0.2: C117.1@254.336,211.294 254.392,211.237 R39.1@257.527,211.237 257.624,211.237 257.576,211.286 257.46,211.401 257.46,211.461 258.303,212.304 U55.1@262.806,212.304 ; R38.1@263.245,215.627 263.245,212.308 U55.1@263.25,212.304
NetC117_2: C117.2 R36.1 R39.2 U55.4 | length 17.8
  Top Layer w0.2: C117.2@254.336,209.439 254.428,209.532 R39.2@257.527,209.532 257.624,209.532 258.754,208.402 U55.4@263.097,208.402 ; U55.4@263.341,208.402 263.393,208.35 R36.1@263.393,199.905
NetC121_2: C121.2 U56.12 | length 5.4
  Top Layer w0.2: C121.2@298.837,221.185 298.837,220.503 301.356,217.984 U56.12@301.356,216.843
NetC124_1: C124.1 U56.9 | length 5.3
  Top Layer w0.2: U56.9@302.856,216.843 302.856,217.123 302.883,217.15 302.883,218.008 305.042,220.167 305.042,220.97 C124.1@305.234,221.162
NetC125_2: C125.2 U57.12 | length 5.4
  Top Layer w0.2: C125.2@327.732,221.245 327.732,220.562 330.251,218.043 U57.12@330.251,216.902
NetC130_1: C130.1 U57.9 | length 4.7
  Top Layer w0.2: U57.9@331.779,217.209 331.779,218.067 333.938,220.226 C130.1@333.938,221.029
NetC134_1: C134.1 R69.2 R70.1 | length 6.7
  Bottom Layer w0.15: C134.1@243.711,207.738 243.739,207.767 244.526,207.767 245.904,206.389 R70.1@245.904,205.07 ; R70.1@246.204,205.07 246.537,204.738 248.48,204.738 R69.2@248.632,204.586
NetC135_1: C135.1 R71.1 R72.2 | length 6.3
  Bottom Layer w0.15: C135.1@243.475,197.239 243.552,197.162 244.577,197.162 245.68,198.264 R71.1@245.68,199.296 ; R71.1@246.173,199.233 246.454,199.513 248.486,199.513 R72.2@248.601,199.629
NetC136_1: C136.1 R73.2 R74.1 | length 6
  Bottom Layer w0.15: C136.1@242.108,173.12 242.895,173.12 244.273,171.742 R74.1@244.273,170.423 ; R74.1@244.905,170.09 R73.2@246.849,170.09
NetC137_1: C137.1 R75.1 R76.2 | length 5.6
  Bottom Layer w0.15: C137.1@241.92,162.514 242.946,162.514 244.048,163.616 R75.1@244.048,164.649 ; R75.1@244.822,164.866 R76.2@246.855,164.866
NetC138_1: C138.1 R77.2 R78.1 | length 6
  Bottom Layer w0.15: C138.1@240.991,139.733 241.778,139.733 243.156,138.355 R78.1@243.156,137.036 ; R78.1@243.789,136.704 R77.2@245.732,136.704
NetC139_1: C139.1 R79.1 R80.2 | length 5.6
  Bottom Layer w0.15: C139.1@240.804,129.128 241.829,129.128 242.932,130.23 R79.1@242.932,131.262 ; R79.1@243.706,131.48 R80.2@245.738,131.48
NetC140_1: C140.1 R81.2 R82.1 | length 5.6
  Bottom Layer w0.15: R81.2@288.677,173.143 R82.1@290.709,173.143 ; R82.1@291.483,173.361 291.483,174.393 292.586,175.495 C140.1@293.611,175.495
NetC141_1: C141.1 R83.1 R84.2 | length 6
  Bottom Layer w0.15: R84.2@288.683,167.919 R83.1@290.626,167.919 ; R83.1@291.259,167.587 291.259,166.268 292.637,164.89 C141.1@293.424,164.89
NetP5_2: P5.2 R4.1 | length 8.4
  Top Layer w0.5: R4.1@128.113,217.36 P5.2@136.463,217.36
NetP18_2: P18.2 U6.13 U7.13 | length 50.3
  Top Layer w0.2: P18.2@147.78,220.565 155.766,220.565 160.106,216.225 U6.13@160.386,216.225 ; v2(168.317,220.08) 169.04,220.804 184.481,220.804 189.002,216.284 U7.13@189.281,216.284
  Bottom Layer w0.2: v2(155.767,220.578) 156.263,220.08 v2(168.317,220.08)
NetP76_2: P76.2 R37.1 | length 8.4
  Top Layer w0.5: R37.1@268.385,217.281 P76.2@276.736,217.281
NetP85_2: P85.2 U56.13 U57.13 | length 50.3
  Top Layer w0.2: P85.2@288.053,220.486 296.038,220.486 300.379,216.146 U56.13@300.658,216.146 ; v2(308.589,220.001) 309.313,220.725 324.754,220.725 329.274,216.205 U57.13@329.554,216.205
  Bottom Layer w0.2: v2(296.039,220.499) 296.536,220.001 v2(308.589,220.001)
NetR3_1: R3.1 U2.2 | length 3.4
  Top Layer w0.15: U2.2@77.875,211.231 R3.1@77.875,214.612
NetR9_1: R9.1 U6.2 | length 4.7
  Top Layer w0.2: R9.1@160.891,209.661 160.891,211.364 161.593,212.066 161.593,214.018 U6.2@161.583,214.027
NetR10_1: R10.1 U6.3 | length 4.9
  Top Layer w0.2: U6.3@162.084,214.027 162.084,212.113 163.041,211.156 163.041,209.887 163.091,209.837 R10.1@163.266,209.661
NetR11_1: R11.1 U8.2 | length 3.4
  Top Layer w0.15: R11.1@77.897,195.493 U8.2@77.897,198.874
NetR12_1: R12.1 U7.2 | length 4.7
  Top Layer w0.2: R12.1@189.786,209.638 189.787,209.72 189.787,211.423 190.488,212.124 190.488,214.077 U7.2@190.479,214.086
NetR13_1: R13.1 U7.3 | length 4.9
  Top Layer w0.2: U7.3@190.979,214.086 190.979,212.172 191.936,211.216 191.936,209.946 192.067,209.815 R13.1@192.162,209.72
NetR14_1: R14.1 U9.2 | length 3.4
  Top Layer w0.15: U9.2@163.453,183.263 R14.1@163.453,186.644
NetR19_1: R19.1 U12.2 | length 3.4
  Top Layer w0.15: U12.2@78.125,177.953 R19.1@78.125,181.333
NetR21_1: R21.1 U13.2 | length 3.4
  Top Layer w0.15: R21.1@163.546,168.407 U13.2@163.546,171.788
NetR22_1: R22.1 U15.2 | length 3.4
  Top Layer w0.15: R22.1@78.11,162.506 U15.2@78.11,165.887
NetR23_1: R23.1 U18.2 | length 3.4
  Top Layer w0.15: U18.2@79.052,143.574 R23.1@79.052,146.954
NetR24_1: R24.1 U22.2 | length 3.4
  Top Layer w0.15: R24.1@78.855,128.218 U22.2@78.855,131.599
NetR27_1: R27.1 U29.1 | length 7.5
  Top Layer w0.5: R27.1@151.505,134.339 U29.1@151.505,141.834
NetR32_1: R32.1 U50.1 | length 7.5
  Top Layer w0.5: R32.1@291.866,134.138 U50.1@291.866,141.633
NetR42_1: R42.1 U56.2 | length 4.7
  Top Layer w0.2: R42.1@301.163,209.582 301.163,211.285 301.865,211.987 301.865,213.939 U56.2@301.856,213.948
NetR43_1: R43.1 U56.3 | length 4.9
  Top Layer w0.2: U56.3@302.356,213.948 302.356,212.034 303.313,211.078 303.313,209.808 R43.1@303.539,209.582
NetR44_1: R44.1 U57.2 | length 4.7
  Top Layer w0.2: R44.1@330.059,209.559 330.059,209.641 330.059,211.344 330.76,212.045 330.76,213.998 U57.2@330.751,214.007
NetR45_1: R45.1 U57.3 | length 4.9
  Top Layer w0.2: U57.3@331.252,214.007 331.252,212.093 332.208,211.136 332.208,209.867 R45.1@332.434,209.641
NetR66_1: R66.1 R67.2 | length 2
  Bottom Layer w0.15: R66.1@214.171,149.772 R66.1@214.196,149.747
  Bottom Layer w1.5: R67.2@214.196,147.759 R66.1@214.196,149.747
NetR85_1: R85.1 VDD_1.K | length 2.5
  Top Layer w0.5: VDD_1.K@41.848,221.024 41.862,221.011 44.299,221.011 R85.1@44.313,220.997
PCB_AGND: C133.2 J31.1 J35.1 P5.1 P14.2 P16.2 P18.3 P20.2 P21.2 P28.2 P28.4 P28.6 P28.8 P56.3 P57.3 P58.3 P59.3 P70.2 P70.4 P70.6 P70.8 P72.3 P73.3 P74.3 P75.3 P76.1 P83.2 P84.2 P85.3 P86.2 P87.2 R8.2 R18.2 R41.2 R68.1 U3.6 U16.4 U16.10 U19.3 U20.4 U20.10 U24.2 U27.2 U30.2 U32.2 U43.4 U43.10 U44.3 U45.4 U45.10 U46.2 U48.2 U51.2 U53.2 U55.6 | length 1870
  Top Layer w0.15: U44.3@301.198,129.713 301.257,129.772 301.257,130.443
  Top Layer w0.2: R8.2@124.719,219.8 124.736,219.816 v2@139.514,219.816 ; P56.3@164.132,114.407 P56.3@164.156,114.383 ; P57.3@164.233,98.455 P57.3@164.257,98.432 ; v2(179.661,129.39) v2@179.681,129.371 ; U20.4@181.091,133.254 U20.4@181.094,133.251 ; P59.3@187.698,114.072 P59.3@187.721,114.048 ; P58.3@187.763,98.122 P58.3@187.787,98.098 ; R41.2@264.992,219.721 265.009,219.737 v2@279.786,219.737 ; P72.3@304.493,114.206 P72.3@304.516,114.182 ; P73.3@304.593,98.255 P73.3@304.618,98.23 ; v2(320.022,129.189) v2@320.041,129.17 ; U45.4@321.451,133.053 U45.4@321.455,133.05 ; P75.3@328.058,113.87 P75.3@328.082,113.847 ; P74.3@328.123,97.921 P74.3@328.148,97.897
  Top Layer w0.3: U24.2@149.101,110.462 U24.2@149.205,110.358 ; U27.2@149.202,94.511 U27.2@149.306,94.407 ; v1(170.173,110.12) 172.774,110.12 U32.2@172.875,110.019 ; v1(170.245,94.131) 170.276,94.1 172.91,94.1 U30.2@172.941,94.07 ; U46.2@289.461,110.261 U46.2@289.565,110.157 ; U48.2@289.562,94.31 U48.2@289.666,94.206 ; v1(310.534,109.92) 313.134,109.92 U53.2@313.236,109.818 ; v1(310.606,93.93) 310.636,93.899 313.27,93.899 U51.2@313.301,93.868
  Top Layer w0.4: v2@179.596,133.258 v2(179.599,133.254) U20.4@181.091,133.254 ; v2(179.6,151.085) 179.631,151.055 U16.4@181.241,151.055 ; v2@179.681,129.371 181,129.371 U20.10@181.094,129.351 ; v2@179.831,147.171 180.989,147.171 U16.10@180.989,147.136 ; v2(319.818,150.801) 321.349,150.801 321.549,150.801 U43.4@321.601,150.854 ; v2@319.956,133.057 v2(319.96,133.053) U45.4@321.451,133.053 ; v2@320.041,129.17 321.36,129.17 U45.10@321.455,129.15 ; 320.132,146.97 321.349,146.97 U43.10@321.349,146.935
  Top Layer w0.5: 146.364,94.511 U27.2@149.202,94.511 ; 146.367,110.462 U24.2@149.101,110.462 ; P56.3@164.156,114.383 164.178,114.361 v1(170.216,114.361) ; P57.3@164.257,98.432 164.279,98.41 v1@170.007,98.41 ; P59.3@187.698,114.237 v3@199.389,114.237 ; P59.3@187.721,114.048 P59.3@187.743,114.026 ; P58.3@187.763,98.287 v1@199.455,98.287 ; P58.3@187.787,98.098 P58.3@187.809,98.076 ; 286.724,94.31 U48.2@289.562,94.31 ; 286.727,110.261 U46.2@289.461,110.261 ; P72.3@304.516,114.182 304.538,114.16 v1(310.576,114.16) ; P73.3@304.618,98.23 304.639,98.209 v1@310.368,98.209 ; P75.3@328.058,114.036 v3@339.749,114.036 ; P75.3@328.082,113.847 P75.3@328.104,113.825 ; P74.3@328.123,98.086 v1@339.815,98.086 ; P74.3@328.148,97.897 P74.3@328.169,97.875
  Top Layer w1: U3.6@127.996,209.751 v4@131.424,209.751 ; v3@146.364,80.671 146.364,94.511 ; 146.367,110.462 146.367,126.402 150.608,130.644 160.838,130.644 ; U19.3@160.838,129.914 160.864,129.941 160.864,130.644 167.045,130.644 ; J31.1@168.945,134.405 167.045,132.505 167.045,130.644 ; 170.162,80.895 v1(170.162,89.016) ; 183.792,126.05 171.639,126.05 167.045,130.644 ; U55.6@267.465,209.622 268.269,209.632 v4@271.696,209.672 ; v3@286.724,80.613 286.724,94.31 ; 286.727,110.261 286.727,126.201 290.969,130.443 301.257,130.443 307.406,130.443 ; J35.1@309.306,134.204 307.406,132.304 307.406,130.443 ; v3@310.522,80.694 v1(310.522,88.815) ; 324.152,125.849 312,125.849 307.406,130.443
  Top Layer w1.5: 30.552,175.676 30.552,177.703 29.673,178.582 v3(22.852,178.582) 22.509,178.239 8.284,178.239 6.883,179.639 6.883,193.014 8.284,194.415 14.397,194.415 30.064,210.082 30.064,231.073 37.476,238.485 v3@337.883,238.485 ; 170.602,81.031 214.388,81.031 ; 181.056,128.785 183.792,126.05 199.472,126.05 v3(199.506,126.084) ; 181.059,146.601 183.809,143.851 v3@199.327,143.851 ; 214.45,81.125 v3@226.307,81.125 ; 321.417,128.584 324.152,125.849 339.832,125.849 v3(339.866,125.883) ; 321.419,146.401 324.17,143.649 v3@339.687,143.649
  Bottom Layer w0.15: R68.1@213.778,142.226 214.059,142.506 R68.1@214.199,142.506
  Bottom Layer w0.2: 138.706,210.515 147.833,201.387 152.64,201.387 ; 139.749,223.105 P18.3@147.78,223.105 ; P21.2@154.776,205.715 152.64,203.579 152.64,201.387 ; v2(179.599,133.254) v2@179.63,133.223 ; v2@179.63,129.421 v2(179.661,129.39) ; P20.2@183.149,207.326 181.068,205.246 181.068,202.299 186.657,196.709 ; P14.2@191.165,196.709 186.657,196.709 ; 279.066,210.348 288.106,201.308 292.912,201.308 ; 280.021,223.026 P85.3@288.053,223.026 ; P87.2@295.048,205.636 292.912,203.5 292.912,201.308 ; v2(319.96,133.053) v2@319.991,133.022 ; v2@319.991,129.22 v2(320.022,129.189) ; P86.2@323.422,207.247 321.341,205.167 321.341,202.22 326.93,196.63 ; P83.2@331.438,196.63 326.93,196.63 ; 152.64,201.387 158.547,195.48 P16.2@161.958,195.48 163.187,196.709 186.657,196.709 ; 292.912,201.308 298.82,195.401 P84.2@302.23,195.401 303.46,196.63 326.93,196.63
  Bottom Layer w0.4: v2@179.61,147.214 v2@179.61,151.016 ; v2@179.63,129.421 v2@179.63,133.223 ; v2@319.774,147.001 v2@319.774,150.803 ; v2@319.991,129.22 v2@319.991,133.022
  Bottom Layer w0.5: v1(170.127,98.398) 170.138,98.408 v1@170.162,98.408 ; v1@170.162,114.307 v1(170.216,114.361) ; v1(199.574,98.275) 199.585,98.286 v1@199.662,98.286 ; v1(310.488,98.197) 310.498,98.208 v1@310.522,98.208 ; v1@310.522,114.106 v1(310.576,114.16) ; v1(339.934,98.074) 339.946,98.085 v1@340.023,98.085
  Bottom Layer w1: v4(131.425,209.742) 137.933,209.742 138.706,210.515 139.556,211.365 v2(139.556,219.804) 139.556,228.729 137.698,230.587 137.698,236.716 v3@135.833,238.58 ; v1(170.162,89.016) 170.162,98.398 170.162,98.408 v1@170.162,114.307 ; v4(271.698,209.663) 278.206,209.663 279.829,211.286 v2(279.829,219.725) 279.829,228.65 276.048,232.431 v3@276.048,238.559 ; v1(310.522,88.815) 310.522,98.197 310.522,98.208 v1@310.522,114.106
  Bottom Layer w1.5: v3(22.852,178.582) 38.642,178.582 43.412,173.811 43.412,93.71 56.094,81.028 v3(187.987,81.028) 189.248,81.028 199.327,91.107 199.327,98.516 199.327,114.315 199.327,126.084 v3(199.327,143.906) 199.327,157.695 199.327,202.296 210.272,213.241 210.272,233.047 211.572,234.346 211.572,235.923 208.841,238.654 v3(208.813,238.654) ; 199.705,141.808 211.31,141.808 211.31,142.646 C133.2@211.36,142.696 ; 211.36,141.808 214.008,141.808 ; v3@226.067,81.042 286.81,81.05 310.541,81.053 329.577,81.056 ; 329.608,80.827 339.687,90.906 339.687,98.315 339.687,114.114 339.687,125.883 v3(339.687,143.705) 339.687,152.414 339.683,154.954 339.678,157.494 339.599,202.217 346.423,209.04 346.423,213.845 346.323,219.15 346.323,224.214 337.569,232.967 v3(337.569,238.454)
  other v2: 319.815,146.99 179.62,147.188
  other v3: 146.463,80.908 310.541,80.913 286.811,80.957 226.067,81.048 339.749,114.114 199.389,114.315 276.008,238.404 135.736,238.483
PCB_DGND: C65.2 C66.2 C67.2 C68.2 C69.2 C70.2 C71.2 C72.2 C73.2 C74.2 C75.2 C76.2 C77.2 C78.2 C79.2 C80.2 C81.2 C82.2 C83.2 C84.2 R20.2 U23.3 U34.3 U35.3 U36.3 U37.3 U38.3 U39.3 U40.3 U41.3 U42.3 | length 338.5
  Top Layer w1: v1(154.485,23.338) 154.485,24.054 ; v1(163.494,23.227) 163.494,24.087 ; v1(172.548,23.173) 172.548,24.033 ; v1(181.607,23.223) 181.607,24.082 ; v1(190.977,23.223) 190.977,24.082 ; v1(200.349,23.268) 200.349,24.127 ; v1(209.311,23.262) 209.311,24.122 ; v1(218.48,23.273) 218.48,24.132 ; v1(227.327,23.212) 227.327,24.071 ; v1(236.256,23.182) 236.256,24.042
  Top Layer w1.5: v3@40.936,154.129 40.936,158.025
  Bottom Layer w1: 134.622,23.324 154.485,23.324 155.613,23.324 156.666,24.377 157.597,24.377 158.257,23.718 ; C65.2@158.616,24.841 158.616,23.39 158.682,23.324 160.905,23.324 163.494,23.324 164.279,23.324 165.394,22.209 166.325,22.209 167.44,23.324 167.473,23.324 ; 160.905,23.366 C69.2@160.905,24.947 ; C70.2@167.458,24.909 167.473,24.885 167.473,23.324 ; 169.763,23.411 C66.2@169.763,24.992 ; C71.2@176.512,24.855 176.527,24.831 176.527,23.324 ; 178.816,23.357 C67.2@178.816,24.938 ; C72.2@185.571,24.905 185.587,24.881 185.587,23.324 ; 187.876,23.406 C68.2@187.876,24.987 ; C76.2@194.94,24.905 194.956,24.881 194.956,23.324 ; 197.245,23.406 C74.2@197.245,24.987 ; C75.2@204.313,24.95 204.329,24.926 204.329,23.767 ; C73.2@206.618,25.032 206.618,23.767 ; C79.2@213.275,24.944 213.29,24.92 213.29,23.34 ; 215.579,23.446 C77.2@215.579,25.027 ; C80.2@222.443,24.955 222.459,24.931 222.459,23.35 ; 224.748,23.456 C78.2@224.748,25.037 ; C83.2@231.291,24.894 231.307,24.87 231.307,23.324 ; 233.596,23.395 C81.2@233.596,24.976 ; C84.2@240.22,24.865 240.235,24.84 240.235,23.324 ; 242.524,23.366 C82.2@242.524,24.947 ; 242.742,23.324 240.235,23.324 ; 167.473,23.324 169.763,23.324 172.548,23.324 176.527,23.324 ; 176.527,23.324 178.816,23.324 181.607,23.324 185.587,23.324 ; 185.587,23.324 187.876,23.324 190.977,23.324 194.956,23.324 ; 194.956,23.324 197.245,23.324 200.349,23.324 201.311,23.324 202.364,24.377 203.295,24.377 203.904,23.767 204.329,23.767 ; 204.329,23.767 206.618,23.767 ; 206.618,23.767 208.472,23.767 208.817,23.423 211.98,23.423 212.079,23.324 213.29,23.324 215.579,23.324 218.48,23.324 222.459,23.324 224.748,23.324 227.327,23.324 231.307,23.324 ; 231.307,23.324 233.596,23.324 236.256,23.324 237.061,23.324 238.154,24.417 239.086,24.417 240.179,23.324 240.235,23.324
  Bottom Layer w1.5: v3(40.909,154.103) 40.909,92.324 54.109,79.124 70.661,79.124 100.971,48.814 109.117,48.814 134.672,23.26 134.622,23.324
RATIOMODE0: J33.23 J34.C23 U26.7 | length 282.2
  Layer 1 w0.15: v2(84.918,20.637) 85.574,19.981 118.65,19.981 132.839,34.169 225.389,34.169 225.865,34.646 225.925,34.646 226.058,34.778 226.238,34.778 226.999,35.539 229.094,37.634 229.094,42.913 J33.23@230.584,44.403
  Layer 2 w0.15: U26.7@83.225,25.89 84.918,24.197 v2(84.918,20.637)
  Bottom Layer w0.15: v2(227.043,35.495) 229.583,35.495 230.903,34.175 275.138,34.175 276.434,35.471 333.679,35.471 334.17,34.981 334.621,34.981 334.629,34.988 335.12,34.496 335.12,34.03 335.44,33.711 335.906,33.711 336.168,33.449 338.72,33.449 338.802,33.531 339.701,33.531 340.176,33.055 340.176,32.285 J34.C23@340.746,31.716
RATIOMODE1: J33.26 J34.C26 U26.8 | length 284.6
  Layer 1 w0.15: v2(84.995,19.66) 118.753,19.66 132.788,33.694 225.822,33.694 226.165,34.038 227.097,34.97 227.26,34.97 231.634,39.343 231.634,42.913 J33.26@233.124,44.403
  Layer 2 w0.15: v2(84.995,19.66) 85.765,20.429 U26.8@85.765,25.89
  Bottom Layer w0.15: v2(226.082,34.121) 226.549,34.588 229.404,34.588 230.146,33.846 267.898,33.846 272.023,29.721 338.16,29.721 339.25,28.631 340.021,28.631 J34.C26@340.746,27.906
REQOFF: J33.11 P63.1 U36.2 | length 62.4
  Top Layer w0.15: P63.1@181.35,18.832 180.675,19.507 180.675,24.775 180.51,24.94 v1(180.51,25.129) 180.512,25.132 181.656,25.132 U36.2@181.658,25.134
  Layer 1 w0.15: v2(219.112,35.372) 219.112,43.09 J33.11@220.424,44.403
  Layer 2 w0.15: v1(180.51,25.129) 180.51,28.791 185.996,34.277 218.016,34.277 v2(219.112,35.372)
REQOFF_EXT: J34.C15 P63.2 U26.3 U36.4 | length 306.2
  Top Layer w0.15: U36.4@183.741,24.484 183.787,24.484 183.89,24.381 P63.2@183.89,18.832
  Layer 1 w0.15: U26.3@73.065,25.89 73.065,16.172 74.967,14.27 104.98,14.27 107.24,12.011 110.011,12.011 110.793,12.793 183.576,12.793 183.655,12.714 v2@271.705,12.714 ; v2@271.759,12.714 v2(271.775,12.698)
  Layer 2 w0.15: v2(183.639,12.73) 183.706,12.797 183.706,18.648 P63.2@183.89,18.832 ; v2(271.775,12.698) 300.941,41.863 v2(342.127,41.863)
  Bottom Layer w0.15: J34.C15@340.746,41.876 340.752,41.869 342.12,41.869 v2(342.127,41.863)
REQON: J33.8 P62.1 U35.2 | length 67.6
  Top Layer w0.15: P62.1@172.468,19.064 171.45,20.082 v1(171.45,25.08) 171.452,25.082 172.597,25.082 U35.2@172.599,25.084
  Layer 1 w0.15: v2(216.419,35.372) 216.419,42.885 217.884,44.35 J33.8@217.884,44.403
  Layer 2 w0.15: v1(171.45,25.08) 171.45,27.031 178.996,34.577 215.624,34.577 v2(216.419,35.372)